# Altium PCB LM317可调稳压输出模块.PcbDoc
Units mm, origin at the board's own origin, x right, y up, seen from the top; angles counter-clockwise.
Board outline 152.4 x 101.6 mm, 2 copper layers (Top Layer, Bottom Layer); 13 components, 6 nets, 32 pads, 1 vias.
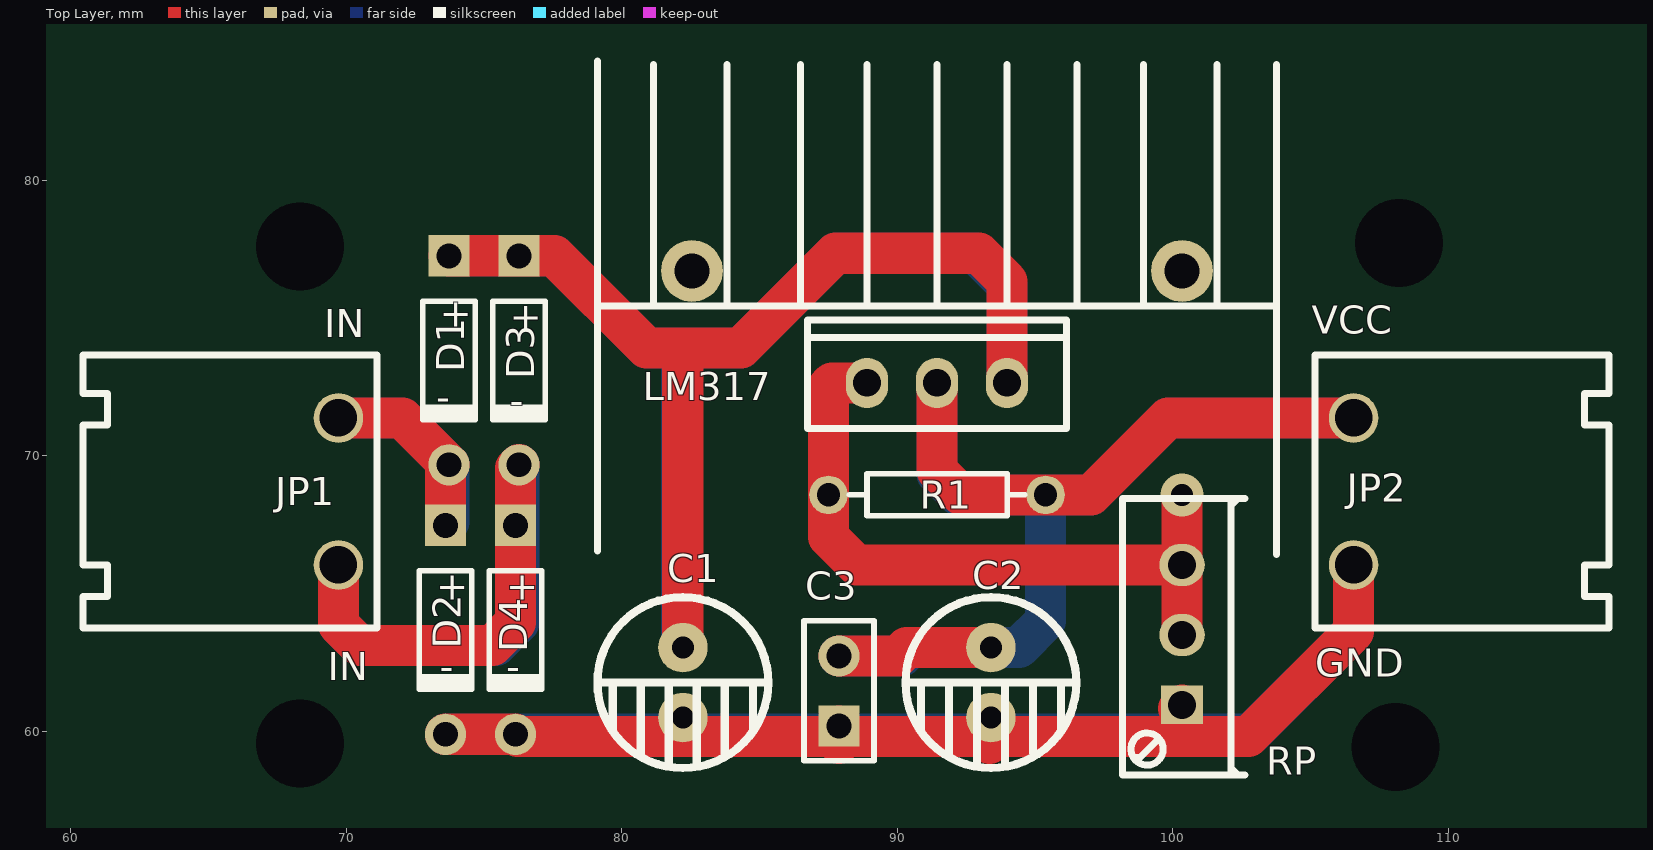
[diagram p0: Top Layer view]
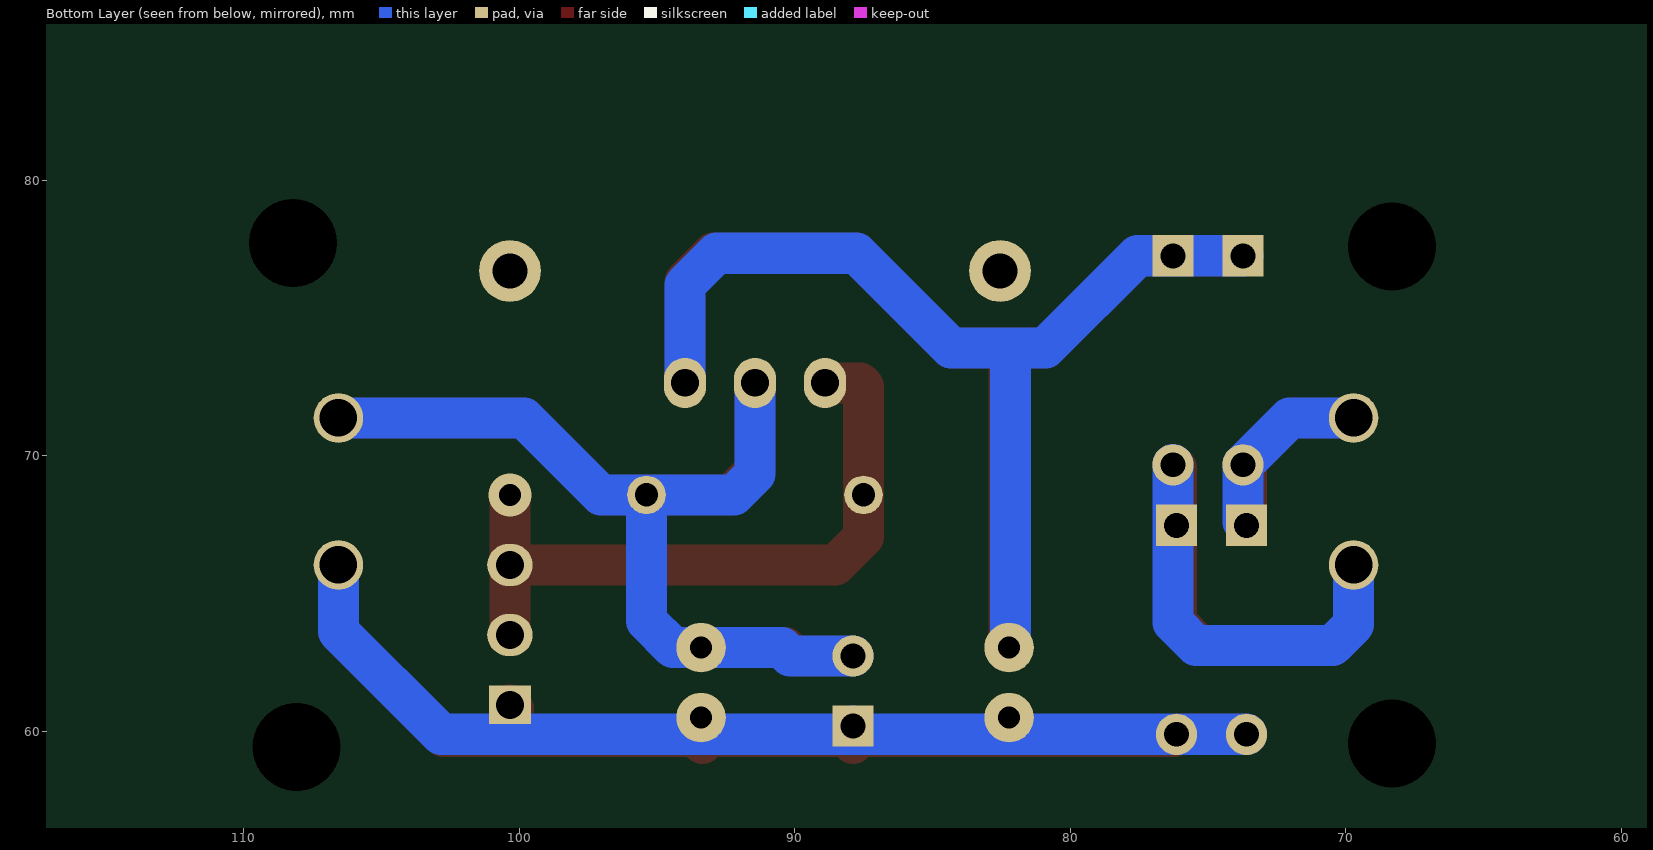
[diagram p1: Bottom Layer view, seen from below]

## Layer stack, top to bottom
Top Layer: signal copper 0.0356
Dielectric: dielectric 0.32, FR-4, Dk 4.8
Bottom Layer: signal copper 0.0356

## Board outline
25.4,25.4 177.8,25.4 177.8,127 25.4,127

## Design rules (kind name [scope] priority, off if disabled: settings)
Clearance [All] p1: gap=1
ComponentClearance [All] p1: gap=0.254 collisioncheckmode=3 verticalgap=0.254
PlaneClearance [All] p1: clearance=1.5
PolygonConnect [All] p1: connectstyle=Relief reliefconductorwidth=0.254 reliefentries=4 polygonreliefangle="90 Angle"
RoutingVias [All] p1: holewidth=0.711 width=1.27 viastyle="Through Hole" minholewidth=0.711 minwidth=1.27 maxholewidth=0.711 maxwidth=1.27
SolderMaskExpansion [All] p1: expansion=1.5
TestPointUsage [All] p1: valid=0 allowmultiple=FALSE
Testpoint [All] p1: side=15 testpointundercomponent=TRUE minsize=1.016 maxsize=2.54 preferedsize=1.524 minholesize=0 maxholesize=1.016 preferedholesize=0.813 testpointgrid=0.025 style=1023 order=0-112345678
Width [All] p1: maxlimit=1.5 minlimit=1.5 preferedwidth=1.5
16 further rules are at their usual default settings.

## Classes and differential pairs
component class LM317可调稳压输出模块: C1 C2 C3 D1 D2 D3 D4 JP1 JP2 LM317 R1 RP

## Components (designator, comment, footprint, x,y, rotation, side; value= is the part's Value field where it differs from the comment)
C1 "DJDR" C-DJ-6 82.296,60.452 r270 top
C2 "DJDR" C-DJ-6 93.472,60.452 r270 top
C3 "CPDR" CPDR 87.884,61.468 r90 top
D1 "Diode 1N4007" D-ZL-10 73.787,69.723 r270 top
D2 "Diode 1N4007" D-ZL-10 73.66,59.944 r270 top
D3 "Diode 1N4007" D-ZL-10 76.327,69.723 r270 top
D4 "Diode 1N4007" D-ZL-10 76.2,59.944 r270 top
JP1 "PZ_2" JIKEKE#1 65.532,73.66 r0 top
JP2 "PZ_2" JIKEKE#2 110.744,73.66 r180 top
LM317 "SDWYG" WYG 91.44,72.644 r0 top
R1 "Res" RSE 91.44,68.58 r0 top
RP "RPot" SIP3-D 100.584,60.96 r90 top
? "Comment" YA_20 91.44,69.088 r0 top

## Footprints (in the part's own frame and the unit in brackets; to place one, negate y for a bottom-side part, rotate by r counter-clockwise, add the part's x,y. Pads: shape width x height; smd on the part's side, far side on the other; paste and mask are expansions set on the pad)
C-DJ-6 [mm] "电容6mm"
  round 1.8 hole 0.8: 1(-2.591,-0.076) 2(-0.051,-0.076)
  silkscreen extent -4.42,-3.18 1.78,3.02
CPDR [mm] "瓷片电容"
  rect 1.5x1.5 hole 0.9: 1(-1.27,0)
  round 1.5 hole 0.9: 2(1.27,0)
  silkscreen extent -2.54,-1.27 2.54,1.27
D-ZL-10 [mm] "整流二极管"
  rect 1.5x1.5 hole 0.9: 1(-7.532,-0.051)
  round 1.5 hole 0.9: 2(0.048,-0.051)
  silkscreen extent -5.89,-1 -1.49,0.9
JIKEKE#1 [mm] "可插拔接线端子"
  round 1.8 hole 1.362: 1(4.191,-2.286) 2(4.191,-7.62)
  silkscreen extent -5.08,-9.91 5.59,0
JIKEKE#2 [mm] "可插拔接线端子"
  round 1.8 hole 1.362: 1(4.191,2.286) 2(4.191,7.62)
  silkscreen extent -5.08,0 5.59,9.91
RSE [mm] "直插电阻1/8W"
  round 1.4 hole 0.85: 1(-3.937,0) 2(3.937,0)
  silkscreen extent -3.17,-0.76 3.17,0.76
SIP3-D [mil] "精调电位器"
  rect 55x60 hole 40: 1(0,10)
  oval 60x65 hole 40: 2(200,10) 3(100,10)
  silkscreen extent -100,-80 295,95
WYG [mm] "三端稳压器"
  oval 1.524x1.824 hole 1: 1(-2.54,0) 2(2.54,0) 3(0,0)
  silkscreen extent -4.7,-1.65 4.7,2.29
YA_20 [mm] "散热片YA-20"
  round 2.24 hole 1.262: 0(-8.89,7.62) 0(8.89,7.62)
  silkscreen extent -12.32,-2.67 12.32,15.24

## Part data
C1 C2: "电解电容"
C3: "瓷片电容"
D1 D2 D3 D4: "1 Amp General Purpose Rectifier"
JP1 JP2: "排针——2"
LM317: "三端稳压器"
R1: "电阻"
RP: "Potentiometer"

## Free pads (board coordinates)
  round 3 hole 3.2: 0(68.326,59.563) 0(68.326,77.597) 0(108.077,59.436) 0(108.204,77.724)

## Via types
v1: diameter 1.57, hole 0.811, Top Layer to Bottom Layer, 1 vias

## Nets (pads, with @x,y where several pads share a name; then routed paths per layer and width w, separated by ;. In a path a pad name is that pad's centre, name@x,y a point inside that pad or via, vN(x,y) a via of type N, cw(c..) or ccw(c..) an arc to the next point about the centre after c; other vN are vias at no path point)
GND: C1.2 C2.2 C3.1 D2.2 D4.2 JP2.2 RP.1 | length 79.3
  Top Layer w1.5: D2.2 D4.2 76.228,59.817 82.169,59.817 82.22,59.868 C1.2 ; C1.2@82.22,59.817 102.743,59.817 106.553,63.627 JP2.2 ; C3.1@87.884,59.563 C3.1 ; 93.345,59.563 93.396,59.614 C2.2 ; RP.1@100.203,60.833 RP.1 100.33,59.817
  Bottom Layer w1.5: D2.2 102.822,59.896 106.553,63.627 JP2.2 ; C1.2@82.22,59.947 C1.2 ; C3.1@87.884,60.023 C3.1 ; C2.2 93.396,60.074 93.574,59.896 C2.2@93.574,60.325
NetC1_1: C1.1 D1.1 D3.1 LM317.2 | length 76
  Top Layer w1.5: D1.1 77.558,77.255 80.899,73.914 84.328,73.914 87.757,77.343 92.964,77.343 93.98,76.327 LM317.2 ; C1.1 82.22,73.838 82.296,73.914
  Bottom Layer w1.5: D1.1 77.558,77.255 80.899,73.914 84.328,73.914 87.757,77.343 92.837,77.343 93.98,76.2 LM317.2 ; 82.169,73.914 82.169,63.094 C1.1
NetD1_2: D1.2 D2.1 JP1.1 | length 13.9
  Top Layer w1.5: JP1.1 72.037,71.374 D1.2 73.609,69.548 D2.1
  Bottom Layer w1.5: JP1.1 72.037,71.374 D1.2 73.736,67.603 D2.1
NetD3_2: D3.2 D4.1 JP1.2 | length 30.1
  Top Layer w1.5: JP1.2 69.723,63.881 70.485,63.119 75.311,63.119 76.149,63.957 76.149,69.548 D3.2
  Bottom Layer w1.5: JP1.2 69.723,63.881 70.485,63.119 75.438,63.119 76.276,63.957 D3.2
NetLM317_1: LM317.1 R1.1 RP.2 RP.3 | length 25.2
  Top Layer w1.5: LM317.1 87.63,72.644 87.503,72.517 87.503,67.056 88.519,66.04 RP.2 ; RP.3 v1(100.33,68.58)
VCC: C2.1 C3.2 JP2.1 LM317.3 R1.2 | length 57.9
  Top Layer w1.5: C3.2 90.043,62.738 90.348,63.043 C2.1 ; LM317.3 91.44,69.469 92.329,68.58 97.028,68.58 99.822,71.374 JP2.1
  Bottom Layer w1.5: C3.2 90.17,62.738 90.475,63.043 94.412,63.043 95.377,64.008 R1.2 ; LM317.3 91.44,69.342 92.202,68.58 97.028,68.58 99.822,71.374 JP2.1
pads on no net: ?.0

## Silkscreen, mask and mechanical layers (free items; w line width, h text height)
Top Overlay:
  text "+" at 73.406,74.676 h1.02
  text "+" at 75.946,74.549 h1.02
  text "VCC" at 105.029,74.422 h1.02
  text "IN" at 69.215,74.295 h1.02
  text "-" at 73.279,71.628 h1.02
  text "-" at 75.946,71.501 h1.02
  text "+" at 73.279,64.77 h1.02
  text "+" at 75.819,64.77 h1.02
  text "GND" at 105.156,61.976 h1.02
  text "IN" at 69.342,61.849 h1.02
  text "-" at 73.406,61.849 h1.02
  text "-" at 75.819,61.849 h1.02
Mechanical 1:
  lines w0.254: 65.913,58.293 67.056,57.15 109.22,57.15 110.49,58.42 110.49,78.74 109.22,80.01 67.056,80.01 65.913,78.867 65.913,58.293